# EAGLE board Arachnode (EAGLE 6.5.0)
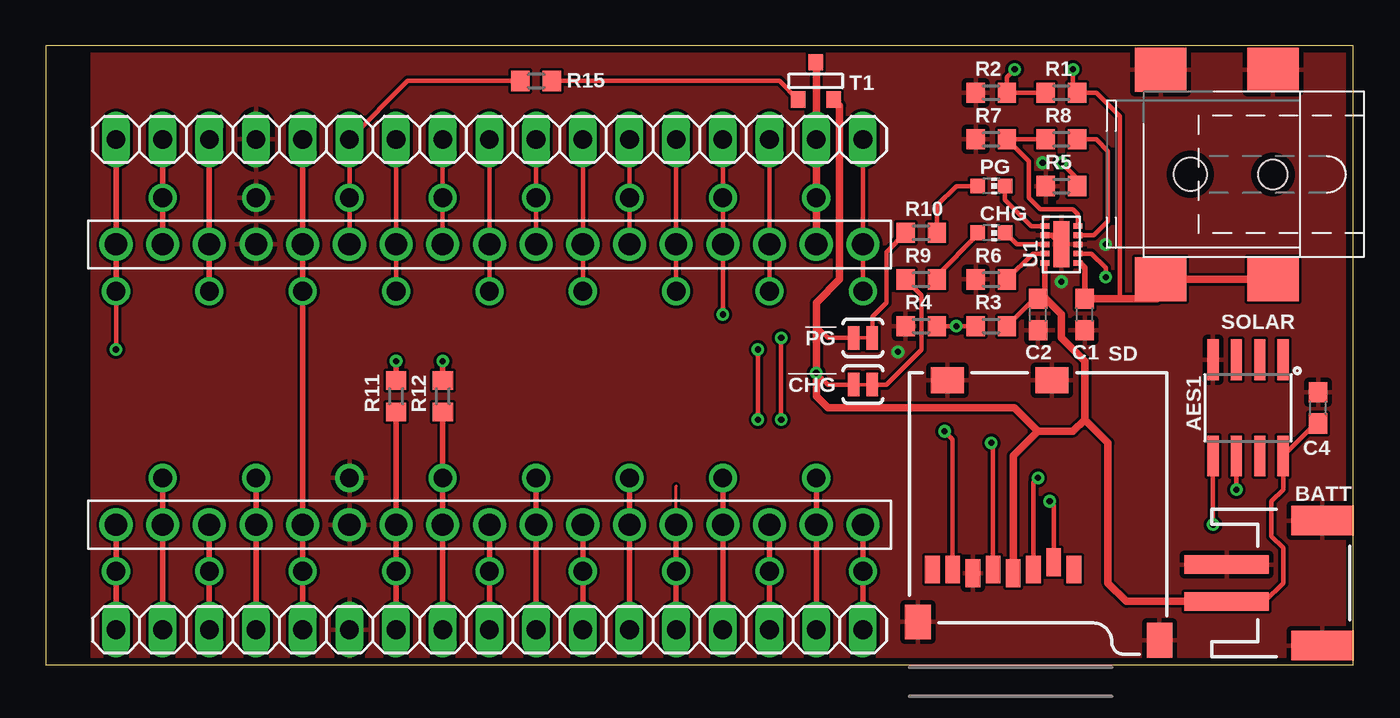
[diagram p0: board, top side]
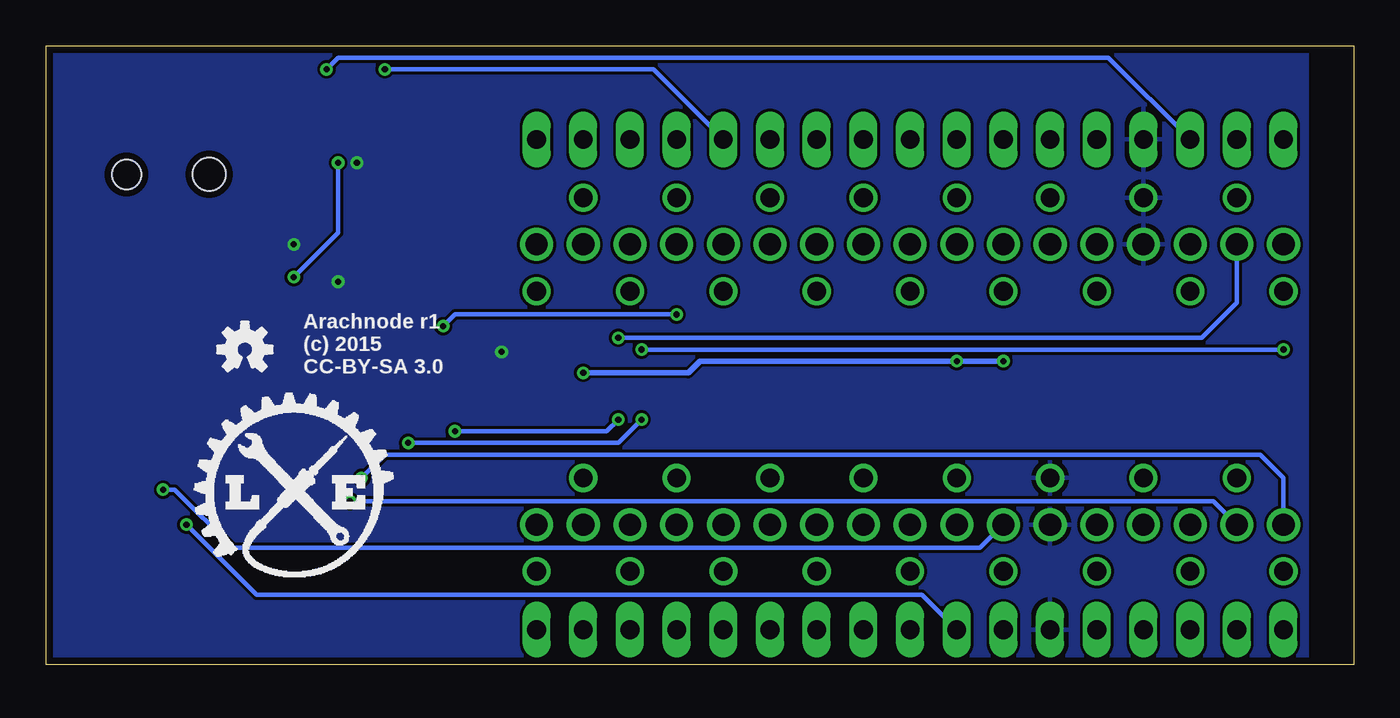
[diagram p1: board, bottom side, seen from below]

Size 71.12 x 33.66 mm. Coordinates in mm from the lower left corner, seen from the top.
Outline: 0,0 71.12,0 71.12,33.66 0,33.66 0,0
Copper layers (1*16): Top 0.0356mm / dielectric 1.5011mm / Bottom 0.0356mm
Design rules "LaenPCBOrder *": minimum track width 6mil, minimum drill 13mil, track to track 6mil, track to pad 6mil, pad to pad 6mil, via to via 6mil, smd to smd 6mil, copper to edge 15mil, drill to drill 6mil, minimum pad ring 7mil, minimum via ring 7mil, stop-mask expansion 4mil, vias tented up to drill 20mil, thermal gap 10mil
Net classes: 0 default: width 0.152 mm, drill 0.33 mm, clearance 0.152 mm

## Footprints (pad centres in the part's own frame; a part is rotated, then mirrored left to right if it is on the bottom)
PAD-JUMPER-2-NC_BY_TRACE_YES_SILK = smd 0.635 x 1.27: 1 -0.508,0; 2 0.508,0
SOIC8 = smd 0.61 x 2.21: 1 -1.905,-2.616; 2 -0.635,-2.616; 3 0.635,-2.616; 4 1.905,-2.616; 5 1.905,2.616; 6 0.635,2.616; 7 -0.635,2.616; 8 -1.905,2.616
JST-2-SMD = smd 1 x 4.6: 1 -1,-3.7; 2 1,-3.7 | smd 1.6 x 3.4: NC1 -3.4,1.5; NC2 3.4,1.5
C0603 = smd 1.1 x 1: 1 -0.85,0; 2 0.85,0
CHIP-LED0603 = smd 0.8 x 0.8: A 0,-0.75; C 0,0.75
4UCONN-12573 = drill 1.2: 1 -20.32,0; 2 -17.78,0; 3 -15.24,0; 4 -12.7,0; 5 -10.16,0; 6 -7.62,0; 7 -5.08,0; 8 -2.54,0; 9 0,0; 10 2.54,0; 11 5.08,0; 12 7.62,0; 13 10.16,0; 14 12.7,0; 15 15.24,0; 16 17.78,0; 17 20.32,0 | drill 1.02: 18 -20.32,-2.54; 19 -17.78,2.54; 20 -15.24,-2.54; 21 -12.7,2.54; 22 -10.16,-2.54; 23 -7.62,2.54; 24 -5.08,-2.54; 25 -2.54,2.54; 26 0,-2.54; 27 2.54,2.54; 28 5.08,-2.54; 29 7.62,2.54; 30 10.16,-2.54; 31 12.7,2.54; 32 15.24,-2.54; 33 17.78,2.54; 34 20.32,-2.54
1X17 = drill 1.016 long: 1 -20.32,0; 2 -17.78,0; 3 -15.24,0; 4 -12.7,0; 5 -10.16,0; 6 -7.62,0; 7 -5.08,0; 8 -2.54,0; 9 0,0; 10 2.54,0; 11 5.08,0; 12 7.62,0; 13 10.16,0; 14 12.7,0; 15 15.24,0; 16 17.78,0; 17 20.32,0
R0603 = smd 1 x 1.1: 1 -0.85,0; 2 0.85,0
MICRO-SD-SOCKET-PP = smd 0.8 x 1.5: 1 -8.94,10.7; 2 -7.84,10.3; 3 -6.74,10.7; 4 -5.64,10.9; 5 -4.54,10.7; 6 -3.44,10.9; 7 -2.34,10.7; 8 -1.24,10.7 | smd 1.8 x 1.4: CD1 -2.05,0.4; CD2 -7.75,0.4 | smd 1.4 x 1.9: GND1 -13.6,14.55; GND3 -0.45,13.55
PJ002A-SMT = smd 2.8 x 2.4: 1A 5,5.7; 1B 11.1,5.7; 2 5,-5.7; 3 11.1,-5.7 | hole 1.6: 5,0 | hole 1.8: 9.5,0
SOT-23 = smd 0.787 x 0.889: 1 0.025,-1.016; 2 -0.94,1.016; 3 0.991,1.016
WSON-10 = smd 0.3 x 0.5: 1 -1,-0.9; 2 -0.5,-0.9; 3 0,-0.9; 4 0.5,-0.9; 5 1,-0.9; 6 1,0.9; 7 0.5,0.9; 8 0,0.9; 9 -0.5,0.9; 10 -1,0.9 | smd 2.5 x 0.85: PAD 0,0

## Placement (x,y rotation side)
!CHG!  JUMPER-PAD-2-NC_BY_TRACE  [PAD-JUMPER-2-NC_BY_TRACE_YES_SILK]  44.45,15.24 180 top
!PG!  JUMPER-PAD-2-NC_BY_TRACE  [PAD-JUMPER-2-NC_BY_TRACE_YES_SILK]  44.45,17.78 180 top
AES1  ATAES132  [SOIC8]  65.41,13.97 180 top
BATT  [JST-2-SMD]  67.94,4.45 270 top
C1  1.0uF  [C0603]  56.52,19.05 90 top
C2  1.0uF  [C0603]  53.98,19.05 90 top
C4  100n  [C0603]  69.22,13.97 90 top
CHG  [CHIP-LED0603]  51.44,23.5 270 top
J1  PINHEAD-17-REV  [4UCONN-12573]  24.13,7.62 0 top
J2  PINHEAD-17-REV  [4UCONN-12573]  24.13,22.86 0 top
JP1  [1X17]  24.13,1.9 0 top
JP2  [1X17]  24.13,28.57 0 top
PG  [CHIP-LED0603]  51.44,26.04 270 top
R1  2M  [R0603]  55.24,31.12 0 top
R2  1M  [R0603]  51.44,31.12 0 top
R3  2M  [R0603]  51.44,18.41 0 top
R4  1M  [R0603]  47.62,18.41 0 top
R5  820R  [R0603]  55.24,26.04 0 top
R6  4K7  [R0603]  51.44,20.96 0 top
R7  33k  [R0603]  51.44,28.57 0 top
R8  68k  [R0603]  55.24,28.57 0 top
R9  10K  [R0603]  47.62,20.96 0 top
R10  10K  [R0603]  47.62,23.5 0 top
R11  4k7  [R0603]  19.05,14.61 90 top
R12  4k7  [R0603]  21.59,14.61 90 top
R15  4k7  [R0603]  26.67,31.75 180 top
SD  USD-SOCKETNEW  [MICRO-SD-SOCKET-PP]  46.99,15.88 180 top
SOLAR  PJ002A-SMT  [PJ002A-SMT]  71.75,26.67 180 top
T1  [SOT-23]  41.91,31.75 180 top
U1  BQ24210  [WSON-10]  55.24,22.86 90 top
U$1  [OSHW-LOGO-S]  60.33,17.14 0 bottom
U$2  [LOGO-SM]  63.5,4.45 0 bottom

## Library data of the parts
!CHG! !PG! = SparkFun-Passives
AES1 = SparkFun-DigitalIC; PROD_ID: IC-11983
BATT = SparkFun-Connectors; PARTNO: S2B-PH-SM4-TB(LF)(SN); PROD_ID: CONN-08352
C1 C2 C4 R1 R3 R5-R12 R15 = resistor
CHG PG = adafruit
J1 J2 JP1 JP2 = logos-headers
R2 R4 = resistor; PARTNO: ERJ-3EKF1004V
SD = SparkFun-Connectors; PARTNO: 502570-0893
SOLAR = logos-headers; PARTNO: PJ-002AH-SMT
T1 = zetex; OC_FARNELL: unknown; OC_NEWARK: unknown
U1 = logos-power
U$1 = SparkFun-Aesthetics
U$2 = logos-faves

## Nets
3V3: J2.16 J2.33 JP2.16 T1.1
+5V: J2.6 J2.23 JP2.6 R15.2
A0: J2.14 J2.31 JP2.14 R3.1 R4.2
A1: J2.13 J2.30 JP2.13 R1.1 R2.2
A2: J2.12 J2.29 JP2.12
A3: J2.11 J2.28 JP2.11
A4: J2.10 J2.27 JP2.10
A5: J2.9 J2.26 JP2.9
AREF: J2.15 J2.32 JP2.15
D0: J1.4 J1.21 JP1.4
D1: J1.3 J1.20 JP1.3
D4: J1.9 J1.26 JP1.9
D5: J1.10 J1.27 JP1.10
D6: J1.11 J1.28 JP1.11
D7: J1.12 J1.29 JP1.12
ESP_RST: J2.8 J2.25 JP2.8
GND: AES1.4 BATT.1 BATT.NC1 BATT.NC2 C1.1 C2.1 C4.2 J1.6 J1.23 J2.4 J2.21 JP1.6 JP2.4 R2.1 R4.1 R5.1 R6.1 R7.1 SD.6 SD.CD1 SD.CD2 SD.GND1 SD.GND3 SOLAR.2 SOLAR.3 U1.3 U1.7 U1.PAD
IO8: J1.13 J1.30 JP1.13
IO9: J1.14 J1.31 JP1.14
IO10: J1.15 J1.32 JP1.15
IO11: J1.16 J1.33 JP1.16
IO12: J1.17 J1.34 JP1.17
IO13: J2.17 J2.34 JP2.17
MISO: J2.2 J2.19 JP2.2 SD.7
MOSI: J1.1 J1.18 JP1.1 SD.3
N$1: R15.1 T1.3
N$3: PG.A R10.2
N$5: R5.2 U1.2
N$6: CHG.A R9.2
N$7: R6.2 U1.9
N$8: R7.2 R8.1 U1.5
N$9: PG.C U1.6
N$10: R8.2 U1.4
N$11: CHG.C U1.8
N$12: !CHG!.1 R9.1
N$13: !PG!.1 R10.1
RESET: J1.5 J1.22 J2.5 J2.22 JP1.5 JP2.5
SCK: J2.1 J2.18 JP2.1 SD.5
SCL: AES1.5 J1.8 J1.25 JP1.8 R12.1
SDA: AES1.6 J1.7 J1.24 JP1.7 R11.1
SS: J1.2 J1.19 JP1.2 SD.2
TOUT: J2.7 J2.24 JP2.7
V_BATT: !CHG!.2 !PG!.2 AES1.8 BATT.2 C2.2 C4.1 R3.2 R11.2 R12.2 SD.4 T1.2 U1.10
VIN: C1.2 J2.3 J2.20 JP2.3 R1.2 SOLAR.1A SOLAR.1B U1.1

## Tracks (layer width: path | path; a pad name or v marks a point on that pad's centre or on a via)
3V3
  Top 0.406: J2.16 J2.33 JP2.16 41.91,32.74 T1.1
+5V
  Top 0.254: J2.6 J2.23 JP2.6 19.68,31.75 R15.2
A0  (via drill 0.33)
  Top 0.254: JP2.14 J2.31 J2.14 v36.83,19.05 | R4.2 v49.53,18.41 R3.1
  Bottom 0.254: v36.83,19.05 48.9,19.05 v49.53,18.41
A1  (via drill 0.33)
  Top 0.254: R1.1 R2.2 52.28,31.96 v52.7,32.38 | JP2.13 J2.13 J2.30
  Bottom 0.254: v52.7,32.38 38.1,32.38 JP2.13
A2
  Top 0.254: J2.12 J2.29 JP2.12
A3
  Top 0.254: JP2.11 J2.11 J2.28
A4
  Top 0.254: J2.10 J2.27 JP2.10
A5
  Top 0.254: JP2.9 J2.9 J2.26
AREF
  Top 0.254: J2.32 J2.15 JP2.15
D0
  Top 0.305: JP1.4 J1.4 J1.21
D1
  Top 0.305: J1.3 J1.20 JP1.3
D4
  Top 0.305: J1.9 J1.26 JP1.9
D5
  Top 0.305: JP1.10 J1.10 J1.27
D6
  Top 0.305: J1.11 J1.28 JP1.11
D7
  Top 0.305: JP1.12 J1.12 J1.29
ESP_RST
  Top 0.254: JP2.8 J2.25 J2.8
GND  (via drill 0.33)
  Top 0.305: U1.7 54.74,23.36 U1.PAD
  other vias: 54.23,27.3 57.66,22.86 55.24,20.83 46.35,17.02
  pour Top: 2.54,0 71.12,0 71.12,33.66 2.54,33.66
  pour Bottom: 2.54,33.66 71.12,33.66 71.12,0 2.54,0
IO8
  Top 0.152: J1.13 34.29,9.71
  Top 0.305: J1.13 J1.30 JP1.13
IO9
  Top 0.305: JP1.14 J1.14 J1.31
IO10
  Top 0.305: J1.15 J1.32 JP1.15
IO11
  Top 0.305: JP1.16 J1.16 J1.33
IO12
  Top 0.305: J1.17 J1.34 JP1.17
IO13
  Top 0.254: JP2.17 J2.17 J2.34
MISO  (via drill 0.33)
  Top 0.254: SD.7 49.33,12.27 v48.9,12.7 | v40.01,13.34 v40.01,17.78
  Top 0.305: JP2.2 J2.19 J2.2
  Bottom 0.254: v48.9,12.7 40.64,12.7 v40.01,13.34 | v40.01,17.78 8.26,17.78 6.35,19.69 J2.2
MOSI  (via drill 0.33)
  Top 0.254: SD.3 53.73,9.91 v53.98,10.16
  Top 0.305: J1.1 J1.18 JP1.1
  Bottom 0.254: v53.98,10.16 52.7,11.43 5.08,11.43 3.81,10.16 J1.1
N$1
  Top 0.254: R15.1 39.9,31.75 T1.3
N$3
  Top 0.254: PG.A 49.53,26.04 48.48,24.98 R10.2
N$5  (via drill 0.33)
  Top 0.254: R5.2 56.09,26.46 v55.24,27.3 | v57.66,21.08 57.66,21.59 56.89,22.36 U1.2
  Bottom 0.254: v55.24,27.3 55.24,23.5 v57.66,21.08
N$6
  Top 0.254: R9.2 48.48,21.17 50.69,23.38 CHG.A
N$7
  Top 0.254: U1.9 53.69,22.36 R6.2
N$8
  Top 0.254: R8.1 R7.2 53.47,27.39 53.47,25.4 54.1,24.77 55.88,24.77 56.15,24.5 U1.5
N$9
  Top 0.254: U1.6 53.61,23.86 52.19,25.29 PG.C
N$10
  Top 0.254: U1.4 57.02,23.36 57.78,24.13 57.78,27.94 57.15,28.57 R8.2
N$11
  Top 0.254: U1.8 52.82,22.86 CHG.C
N$12
  Top 0.254: !CHG!.1 45.72,15.24 47.62,17.14 47.62,20.11 R9.1
N$13
  Top 0.254: !PG!.1 44.96,18.92 45.72,19.69 45.72,22.44 R10.1
RESET
  Top 0.305: JP2.5 J2.5 J2.22 J1.5 J1.22 JP1.5
SCK  (via drill 0.33)
  Top 0.254: SD.5 51.53,11.97 v51.44,12.07 | v38.73,13.34 v38.73,17.14 | v3.81,17.14 J2.18
  Top 0.305: JP2.1 J2.1 J2.18
  Bottom 0.254: v51.44,12.07 40.01,12.07 v38.73,13.34 | v38.73,17.14 v3.81,17.14
SCL  (via drill 0.33)
  Top 0.254: AES1.5 v63.5,7.62
  Top 0.305: JP1.8 J1.8 J1.25 R12.1
  Bottom 0.254: v63.5,7.62 59.69,3.81 23.5,3.81 JP1.8
SDA  (via drill 0.33)
  Top 0.254: AES1.6 v64.77,9.52
  Top 0.305: JP1.7 J1.24 J1.7 R11.1
  Bottom 0.254: v64.77,9.52 64.14,9.52 60.96,6.35 20.32,6.35 J1.7
SS  (via drill 0.33)
  Top 0.254: SD.2 54.83,8.67 v54.61,8.89
  Top 0.305: J1.19 J1.2 JP1.2
  Bottom 0.254: J1.2 7.62,8.89 v54.61,8.89
TOUT
  Top 0.254: J2.24 J2.7 JP2.7
V_BATT  (via drill 0.33)
  Top 0.254: C2.2 53.77,19.9 R3.2 | !PG!.2 42.55,17.78 41.91,18.41 | !CHG!.2 42.55,15.24 v41.91,15.88 | C4.1 69.08,13.12 AES1.8 67.31,9.52 66.67,8.89 66.67,6.98 67.31,6.35 67.31,4.45 66.31,3.44 BATT.2
  Top 0.305: U1.10 54.34,20.27 C2.2 | R11.2 v19.05,16.51 | R12.2 v21.59,16.51
  Top 0.406: C2.2 54.4,19.9 55.24,19.05 55.24,17.78 56.52,16.51 56.52,13.34 | SD.4 52.63,11.36 53.98,12.7 | 53.98,12.7 52.7,13.97 42.55,13.97 41.91,14.61 v41.91,15.88 41.91,18.41 41.91,19.69 43.18,20.96 43.18,30.4 T1.2 | 53.98,12.7 55.88,12.7 56.52,13.34 | BATT.2 58.78,3.44 57.78,4.45 57.78,12.07 56.52,13.34
  Bottom 0.305: v19.05,16.51 v21.59,16.51 35.56,16.51 36.2,15.88 v41.91,15.88
VIN  (via drill 0.33)
  Top 0.254: 58.42,19.9 58.42,29.85 57.15,31.12 R1.2 55.88,31.12 v55.88,32.38
  Top 0.305: J2.20 J2.3 JP2.3 | U1.1 56.24,21.86 56.52,21.59 C1.2
  Top 0.406: C1.2 58.42,19.9 60.45,19.9 SOLAR.1B SOLAR.1A
  Bottom 0.254: v55.88,32.38 55.24,33.02 13.34,33.02 JP2.3

## Text on the board
bPlace: Arachnode r1 / (c) 2015 / CC-BY-SA 3.0